# EAGLE board PowerBUS9 (EAGLE 7.5.0)
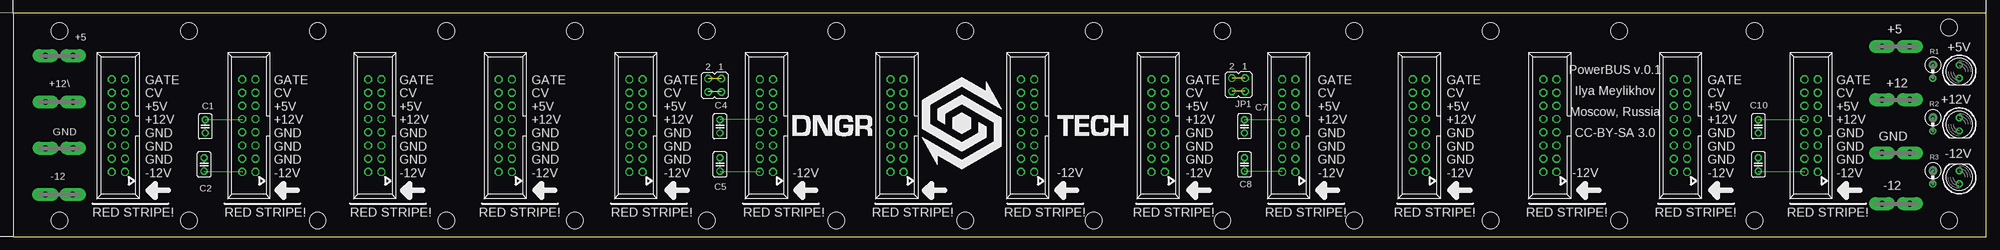
[diagram p0: board, top side]
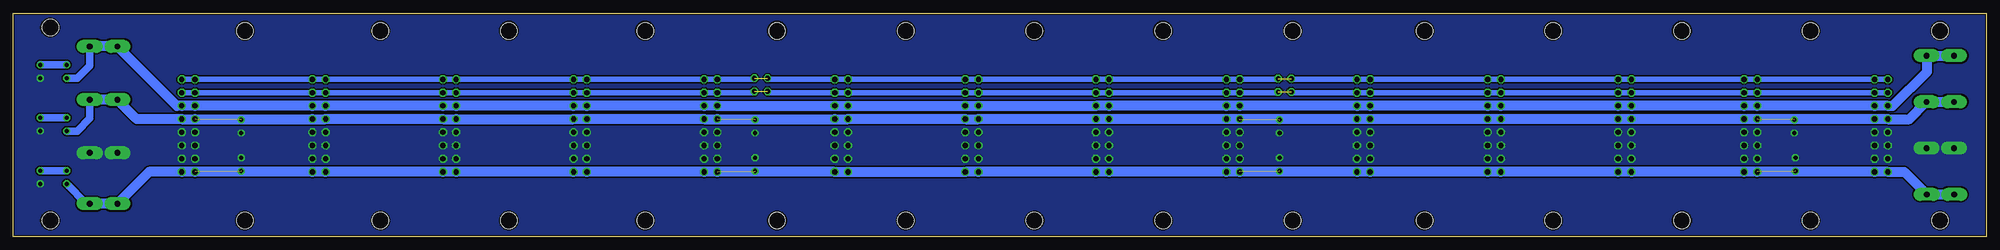
[diagram p1: board, bottom side, seen from below]

Size 379.37 x 43 mm. Coordinates in mm from the lower left corner, seen from the top.
Outline: 0,0 379.37,0 379.37,43 0,43 0,0
Copper layers (1*16): Top 0.035mm / dielectric 1.5mm / Bottom 0.035mm
Design rules "default *": minimum track width 10mil, minimum drill 0.3mm, track to track 0.3mm, track to pad 0.3mm, pad to pad 0.3mm, via to via 0.3mm, smd to smd 0.3mm, copper to edge 0.3mm, drill to drill 0.00761875mm, minimum pad ring 10mil, minimum via ring 8mil, stop-mask expansion 4mil, vias tented up to drill 0mil, thermal gap 10mil
Holes 3.2 mm at 8.92,3.13 8.92,39.56 83.3,39.56 83.3,3.13 33.84,39.56 33.84,3.13 58.57,39.56 58.57,3.13 108.03,39.56 108.03,3.13 257.84,3.13 257.84,39.56 334.76,39.56 334.76,3.13 284.03,39.56 284.03,3.13 308.76,39.56 308.76,3.13 372.19,40.2 372.19,3.13 133.38,3.13 133.38,39.56 207.76,39.56 207.76,3.13 158.3,39.56 158.3,3.13 183.03,39.56 183.03,3.13 232.49,39.56 232.49,3.13
bKeepout: area 198.9,19.7 to 202.1,22.7; area 186.3,1.5 to 189,4.1

## Footprints (pad centres in the part's own frame; a part is rotated, then mirrored left to right if it is on the bottom)
C025-025X050 = drill 0.813 octagon: 1 -1.27,0; 2 1.27,0
F061.040 = drill 1.1 pad 2.54 long: A1 -2.65,0; A2 2.65,0
JP2Q = drill 0.914 octagon: 1 -1.27,-1.27; 2 1.27,-1.27; 3 -1.27,1.27; 4 1.27,1.27
LED5MM = drill 0.813 octagon: A -1.27,0; K 1.27,0
0309V = drill 0.813 octagon: 1 -1.27,0; 2 1.27,0
057-016-1 = drill 1 octagon: 1 -8.89,-1.27; 2 -8.89,1.27; 3 -6.35,-1.27; 4 -6.35,1.27; 5 -3.81,-1.27; 6 -3.81,1.27; 7 -1.27,-1.27; 8 -1.27,1.27; 9 1.27,-1.27; 10 1.27,1.27; 11 3.81,-1.27; 12 3.81,1.27; 13 6.35,-1.27; 14 6.35,1.27; 15 8.89,-1.27; 16 8.89,1.27

## Placement (x,y rotation side)
C1  1u  [C025-025X050]  36.94,21.2 270 top
C2  1u tantalio  [C025-025X050]  36.72,13.89 270 top
C4  1u tantalio  [C025-025X050]  135.89,21.2 270 top
C5  1u tantalio  [C025-025X050]  135.89,13.89 270 top
C7  1u tantalio  [C025-025X050]  236.7,21.2 270 top
C8  1u tantalio  [C025-025X050]  236.7,13.89 270 top
C10  1u tantalio  [C025-025X050]  335.53,21.2 270 top
C11  1u tantalio  [C025-025X050]  335.53,13.89 270 top
J1  PIN2F061.040  [F061.040]  8.89,34.8 0 top
J2  PIN2F061.040  [F061.040]  8.89,25.91 0 top
J3  PIN2F061.040  [F061.040]  8.89,17.02 0 top
J4  PIN2F061.040  [F061.040]  8.83,8.13 0 top
J5  PIN2F061.040  [F061.040]  361.95,36.58 0 top
J6  PIN2F061.040  [F061.040]  361.95,26.34 0 top
J7  PIN2F061.040  [F061.040]  361.95,16.13 0 top
J8  PIN2F061.040  [F061.040]  361.95,6.35 0 top
JP1  [JP2Q]  235.59,29.21 180 top
JP5  [JP2Q]  134.9,29.11 180 top
LED1  [LED5MM]  374.14,31.75 270 top
LED2  [LED5MM]  374.14,11.43 90 top
LED3  [LED5MM]  374.14,21.59 270 top
R1  220R  [0309V]  369.06,31.75 270 top
R2  1K  [0309V]  369.06,21.59 270 top
R3  1K  [0309V]  369.06,11.43 270 top
X1  057-016-1  [057-016-1]  20.24,21.35 90 top
X2  057-016-1  [057-016-1]  45.34,21.35 90 top
X3  057-016-1  [057-016-1]  69.54,21.35 90 top
X4  057-016-1  [057-016-1]  94.64,21.35 90 top
X5  057-016-1  [057-016-1]  119.74,21.35 90 top
X6  057-016-1  [057-016-1]  144.84,21.35 90 top
X7  057-016-1  [057-016-1]  169.94,21.35 90 top
X8  057-016-1  [057-016-1]  220.14,21.35 90 top
X9  057-016-1  [057-016-1]  245.24,21.35 90 top
X10  057-016-1  [057-016-1]  270.34,21.35 90 top
X11  057-016-1  [057-016-1]  320.54,21.35 90 top
X12  057-016-1  [057-016-1]  295.44,21.35 90 top
X13  057-016-1  [057-016-1]  345.64,21.35 90 top
X14  057-016-1  [057-016-1]  195.04,21.35 90 top

## Library data of the parts
C1 C2 C4 C5 C7 C8 C10 C11 R1-R3 = rcl
J1-J8 = con-faston; OC_FARNELL: unknown; OC_NEWARK: unknown
JP1 JP5 = jumper
LED1-LED3 = led
X1-X14 = con-panduit; OC_FARNELL: unknown; OC_NEWARK: unknown

## Nets
0V: C1.2 C2.1 C4.2 C5.1 C7.2 C8.1 C10.2 C11.1 J3.A1 J3.A2 J7.A1 J7.A2 LED1.K LED2.A LED3.K X1.3 X1.4 X1.5 X1.6 X1.7 X1.8 X2.3 X2.4 X2.5 X2.6 X2.7 X2.8 X3.3 X3.4 X3.5 X3.6 X3.7 X3.8 X4.3 X4.4 X4.5 X4.6 X4.7 X4.8 X5.3 X5.4 X5.5 X5.6 X5.7 X5.8 X6.3 X6.4 X6.5 X6.6 X6.7 X6.8 X7.3 X7.4 X7.5 X7.6 X7.7 X7.8 X8.3 X8.4 X8.5 X8.6 X8.7 X8.8 X9.3 X9.4 X9.5 X9.6 X9.7 X9.8 X10.3 X10.4 X10.5 X10.6 X10.7 X10.8 X11.3 X11.4 X11.5 X11.6 X11.7 X11.8 X12.3 X12.4 X12.5 X12.6 X12.7 X12.8 X13.3 X13.4 X13.5 X13.6 X13.7 X13.8 X14.3 X14.4 X14.5 X14.6 X14.7 X14.8
+5V: J1.A1 J1.A2 J5.A1 J5.A2 R1.2 X1.11 X1.12 X2.11 X2.12 X3.11 X3.12 X4.11 X4.12 X5.11 X5.12 X6.11 X6.12 X7.11 X7.12 X8.11 X8.12 X9.11 X9.12 X10.11 X10.12 X11.11 X11.12 X12.11 X12.12 X13.11 X13.12 X14.11 X14.12
+12V: C1.1 C4.1 C7.1 C10.1 J2.A1 J2.A2 J6.A1 J6.A2 R2.2 X1.9 X1.10 X2.9 X2.10 X3.9 X3.10 X4.9 X4.10 X5.9 X5.10 X6.9 X6.10 X7.9 X7.10 X8.9 X8.10 X9.9 X9.10 X10.9 X10.10 X11.9 X11.10 X12.9 X12.10 X13.9 X13.10 X14.9 X14.10
-12V: C2.2 C5.2 C8.2 C11.2 J4.A1 J4.A2 J8.A1 J8.A2 R3.2 X1.1 X1.2 X2.1 X2.2 X3.1 X3.2 X4.1 X4.2 X5.1 X5.2 X6.1 X6.2 X7.1 X7.2 X8.1 X8.2 X9.1 X9.2 X10.1 X10.2 X11.1 X11.2 X12.1 X12.2 X13.1 X13.2 X14.1 X14.2
N$1: LED2.K R3.1
N$4: LED1.A R1.1
N$6: LED3.A R2.1
VPP: JP1.3 JP1.4 JP5.3 JP5.4 X1.13 X1.14 X2.13 X2.14 X3.13 X3.14 X4.13 X4.14 X5.13 X5.14 X6.13 X6.14 X7.13 X7.14 X8.13 X8.14 X9.13 X9.14 X10.13 X10.14 X11.13 X11.14 X12.13 X12.14 X13.13 X13.14 X14.13 X14.14
VSS: JP1.1 JP1.2 JP5.1 JP5.2 X1.15 X1.16 X2.15 X2.16 X3.15 X3.16 X4.15 X4.16 X5.15 X5.16 X6.15 X6.16 X7.15 X7.16 X8.15 X8.16 X9.15 X9.16 X10.15 X10.16 X11.15 X11.16 X12.15 X12.16 X13.15 X13.16 X14.15 X14.16

## Tracks (layer width: path | path; a pad name or v marks a point on that pad's centre or on a via)
0V
  pour Bottom (no thermals): -1.85,45.21 383.27,45.21 382,-2.54 -1.85,-2.54
+5V
  Bottom 1.422: J5.A2 364.6,32.91 367.03,30.48 R1.2
  Bottom 1.93: J1.A1 J1.A2 11.43,34.69 11.43,31.75 18.02,25.16 X1.12 X1.11 X2.12 X2.11 X3.12 X3.11 X4.12 X4.11 X5.12 X5.11 X6.12 X6.11 X7.12 X7.11 X14.12 X14.11 X8.12 X8.11 X9.12 X9.11 X10.12 X10.11 X12.12 X12.11 X11.12 X11.11 X13.12 X13.11 347.88,25.16 J5.A1 J5.A2
+12V  (4 unrouted)
  Bottom 1.422: J6.A2 364.6,22.75 367.03,20.32 R2.2
  Bottom 1.93: J6.A2 J6.A1 355.58,22.62 X13.9 X13.10 X11.9 X11.10 X12.9 X12.10 X10.9 X10.10 X9.9 X9.10 X8.9 X8.10 X14.9 X14.10 X7.9 X7.10 X6.9 X6.10 X5.9 X5.10 X4.9 X4.10 X3.9 X3.10 X2.9 X2.10 X1.9 X1.10 14.83,22.62 J2.A2 J2.A1
-12V  (4 unrouted)
  Bottom 1.422: J8.A2 365.25,6.35 R3.2
  Bottom 1.93: J4.A1 J4.A2 15.81,12.46 X1.2 X1.1 X2.2 X2.1 X3.2 X3.1 X4.2 X4.1 X5.2 X5.1 X6.2 X6.1 X7.2 X7.1 X14.2 X14.1 X8.2 X8.1 X9.2 X9.1 X10.2 X10.1 X12.2 X12.1 X11.2 X11.1 X13.2 X13.1 353.19,12.46 J8.A1 J8.A2
N$1
  Bottom 1.422: R3.1 LED2.K
N$4
  Bottom 1.422: R1.1 LED1.A
N$6
  Bottom 1.422: R2.1 LED3.A
VPP  (2 unrouted)
  Bottom 1.016: X13.13 X13.14 X11.13 X11.14 X12.13 X12.14 X10.13 X10.14 X9.13 X9.14 236.85,27.7 JP1.3 | X1.14 X1.13 X2.14 X2.13 X3.14 X3.13 X4.14 X4.13 X5.14 X5.13 133.63,27.7 JP5.4 | JP1.4 234.31,27.7 X8.13 X8.14 X14.13 X14.14 X7.13 X7.14 X6.13 X6.14 136.17,27.7 JP5.3
VSS  (2 unrouted)
  Bottom 1.016: X13.15 X13.16 X11.15 X11.16 X12.15 X12.16 X10.15 X10.16 X9.15 X9.16 236.85,30.24 JP1.1 | X1.16 X1.15 X2.16 X2.15 X3.16 X3.15 X4.16 X4.15 X5.16 X5.15 133.63,30.24 JP5.2 | JP1.2 234.31,30.24 X8.15 X8.16 X14.15 X14.16 X7.15 X7.16 X6.15 X6.16 136.17,30.24 JP5.1

## Text on the board
tPlace: +5V | PowerBUS v.0.1 / Ilya Meylikhov / Moscow, Russia / CC-BY-SA 3.0 | +12V | -12V | GATE / CV / +5V / +12V / GND / GND / GND / -12V | GATE / CV / +5V / +12V / GND / GND / GND / -12V | GATE / CV / +5V / +12V / GND / GND / GND / -12V | GATE / CV / +5V / +12V / GND / GND / GND / -12V | GATE / CV / +5V / +12V / GND / GND / GND / -12V | -12V | -12V | GATE / CV / +5V / +12V / GND / GND / GND / -12V | GATE / CV / +5V / +12V / GND / GND / GND / -12V | GATE / CV / +5V / +12V / GND / GND / GND / -12V | -12V | GATE / CV / +5V / +12V / GND / GND / GND / -12V | GATE / CV / +5V / +12V / GND / GND / GND / -12V | RED STRIPE! | RED STRIPE! | RED STRIPE! | RED STRIPE! | RED STRIPE! | RED STRIPE! | RED STRIPE! | RED STRIPE! | RED STRIPE! | RED STRIPE! | RED STRIPE! | RED STRIPE! | RED STRIPE! | RED STRIPE!
tNames: +5 | +5 | +12 | +12\ | GND | GND | -12 | -12